# Altium PCB MSPpcb.PcbDoc
Units mil, origin at the board's own origin, x right, y up, seen from the top; angles counter-clockwise.
Board outline 6000 x 4000 mil, 2 copper layers (Top Layer, Bottom Layer); 37 components, 58 nets, 273 pads, 0 vias.
Unrouted connection lines stored in the file: 104.
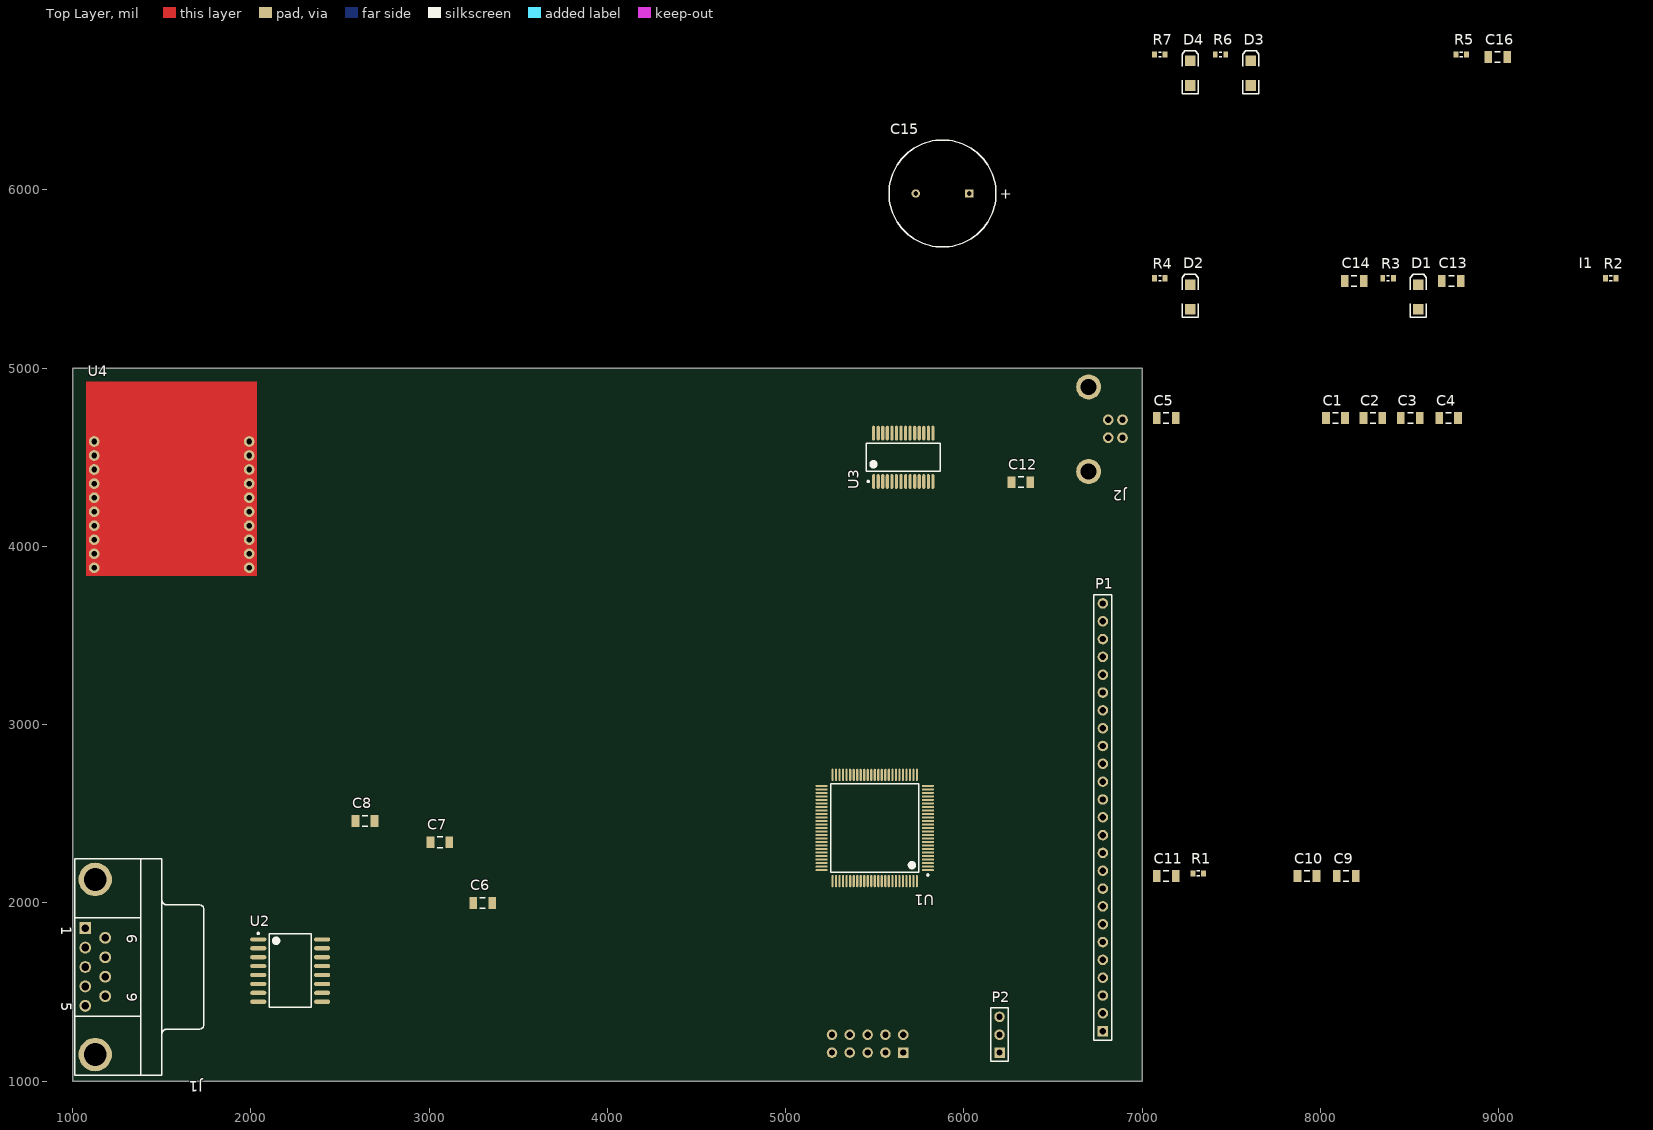
[diagram p0: Top Layer view]
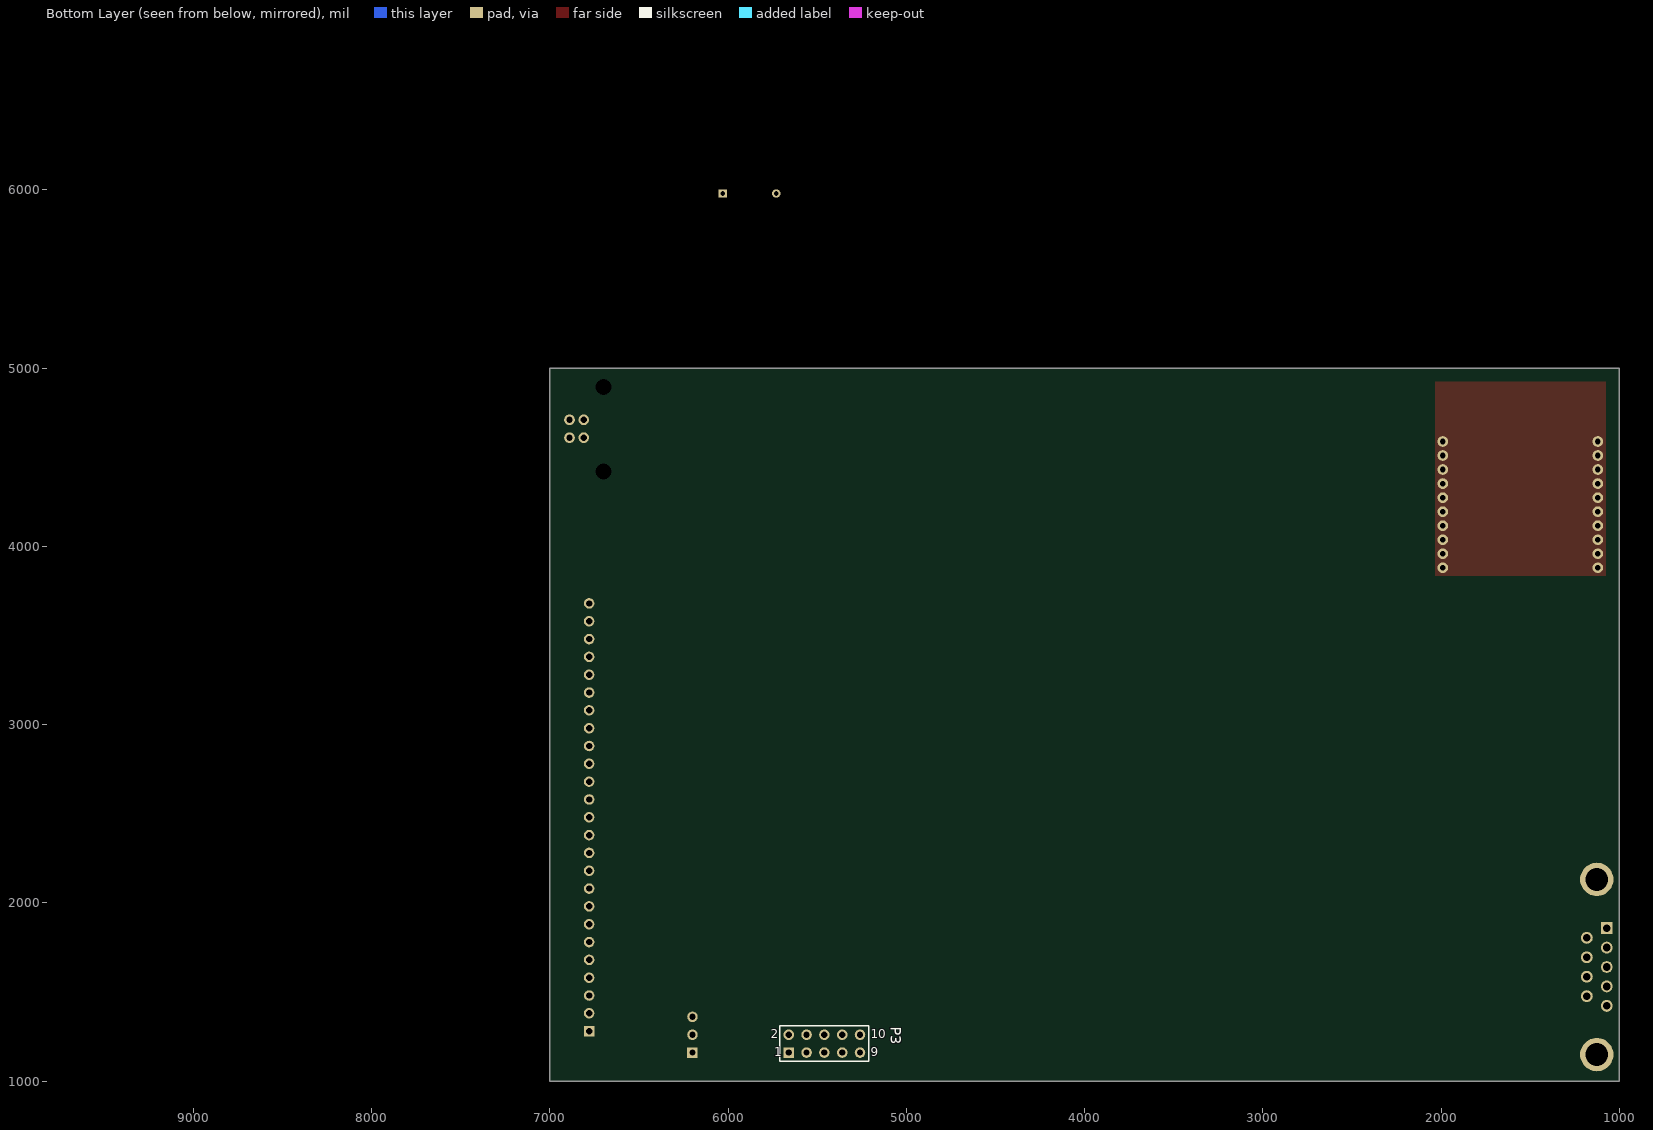
[diagram p1: Bottom Layer view, seen from below]

## Layer stack, top to bottom
Top Layer: signal copper 1.4
Dielectric: dielectric 12.6, FR-4, Dk 4.8
Bottom Layer: signal copper 1.4

## Board outline
1000,1000 7000,1000 7000,5000 1000,5000

## Design rules (kind name [scope] priority, off if disabled: settings)
Clearance [All] p1: gap=10
PolygonConnect [All] p1: connectstyle=Relief reliefconductorwidth=10 reliefentries=4 polygonreliefangle="90 Angle"
RoutingVias [All] p1: holewidth=28 width=50 viastyle="Through Hole" minholewidth=28 minwidth=50 maxholewidth=28 maxwidth=50
SilkscreenOverComponentPads [All] p1: minsilkscreentomaskgap=10
SolderMaskExpansion [All] p1: expansion=4
Width [All] p1: maxlimit=10 minlimit=10 preferedwidth=10
27 further rules are at their usual default settings.

## Classes and differential pairs
net class U4_Nets: GND NetR5_1 NetU4_4 NetU4_6 NetU4_7 NetU4_8 NetU4_9 NetU4_11 NetU4_12 NetU4_13 NetU4_14 NetU4_15 NetU4_16 NetU4_17 NetU4_18 NetU4_19 NetU4_20 VCC-3.3V XBEE_DIN XBEE_DOUT
net class U3_Nets: GND MSP_RTS MSP_RXD1 MSP_TXD1 NetC6_1 NetC13_2 NetJ2_2 NetJ2_3 NetU3_2 NetU3_6 NetU3_8 NetU3_9 NetU3_10 NetU3_11 NetU3_12 NetU3_13 NetU3_14 NetU3_19 NetU3_24 NetU3_27 NetU3_28 USB_RX USB_TX
net class U2_Nets: GND MSP_RXD3 MSP_TXD3 NetC6_1 NetC6_2 NetC7_1 NetC7_2 NetC8_1 NetC8_2 NetU2_6 NetU2_7 NetU2_8 NetU2_9 NetU2_10 RS232_RX RS232_TX
net class U1_Nets: GND H1_1 H1_2 H1_3 H1_4 H1_5 H1_6 H1_7 H1_8 H1_9 H1_10 H1_17 H1_18 H1_19 H1_20 H1_21 H1_22 H1_23 H1_24 H1_25 JTAG_RST JTAG_TCK JTAG_TDI JTAG_TDO JTAG_TEST JTAG_TMS MSP_RXD1 MSP_RXD3 MSP_TXD1 MSP_TXD3 NetC5_1 NetU1_13 NetU1_14 NetU1_26 NetU1_27 NetU1_28 NetU1_29 NetU1_30 NetU1_31 NetU1_32 NetU1_33 NetU1_34 NetU1_35 NetU1_36 NetU1_39 NetU1_40 NetU1_41 NetU1_42 NetU1_43 NetU1_44 NetU1_45 NetU1_46 NetU1_47 NetU1_48 NetU1_49 NetU1_50 NetU1_51 NetU1_52 NetU1_55 NetU1_56 NetU1_57 NetU1_58 NetU1_59 NetU1_60 NetU1_61 NetU1_65 NetU1_66 NetU1_67 NetU1_68 NetU1_69 NetU1_70 NetU1_71 NetU1_74 NetU1_75 NetU1_76 NetU1_77 NetU1_78 NetU1_79 NetU1_82 NetU1_83 NetU1_84 NetU1_85 NetU1_86 NetU1_89 NetU1_90 NetU1_97 NetU1_98 NetU1_99 NetU1_100 VCC-3.3V XBEE_DIN XBEE_DOUT
net class R7_Nets: NetD4_1 VCC
net class R6_Nets: NetD3_1 VCC
net class R5_Nets: NetR5_1 VCC-3.3V
net class R4_Nets: NetD2_1 VCC-3.3V
net class R3_Nets: NetD1_1 VCC-3.3V
net class R2_Nets: MSP_RTS VCC-3.3V
net class R1_Nets: JTAG_RST NetR1_2
net class P3_Nets: GND JTAG_RST JTAG_TCK JTAG_TDI JTAG_TDO JTAG_TEST JTAG_TMS NetP3_2 NetP3_4 NetP3_10
net class P2_Nets: VCC-3.3V VCCTARGET VCCTOOL
net class P1_Nets: H1_1 H1_2 H1_3 H1_4 H1_5 H1_6 H1_7 H1_8 H1_9 H1_10 H1_17 H1_18 H1_19 H1_20 H1_21 H1_22 H1_23 H1_24 H1_25 NetP1_11 NetP1_12 NetP1_13 NetP1_14 NetP1_15 NetP1_16
net class J2_Nets: NetC12_2 NetI1_1 NetJ2_2 NetJ2_3
net class J1_Nets: GND NetJ1_1 NetJ1_2 NetJ1_3 NetJ1_4 NetJ1_6 NetJ1_7 NetJ1_8 NetJ1_9
net class I1_Nets: NetC6_1 NetI1_1
net class D4_Nets: NetD4_1 XBEE_DIN
net class D3_Nets: NetD3_1 XBEE_DOUT
net class D2_Nets: NetD2_1 USB_TX
net class D1_Nets: NetD1_1 USB_RX
net class C16_Nets: GND VCC-3.3V
net class C15_Nets: GND VCC-3.3V
net class C14_Nets: GND VCC-3.3V
net class C13_Nets: GND NetC13_2
net class C12_Nets: GND NetC12_2
net class C11_Nets: GND JTAG_RST
net class C10_Nets: GND NetC10_2
net class C9_Nets: GND NetC6_1
net class C8_Nets: NetC8_1 NetC8_2
net class C7_Nets: NetC7_1 NetC7_2
net class C6_Nets: NetC6_1 NetC6_2
net class C5_Nets: GND NetC5_1
net class C4_Nets: GND VCC
net class C3_Nets: GND VCC
net class C2_Nets: GND VCC
net class C1_Nets: GND VCC
component class XBee: C16 D3 D4 R5 R6 R7 U4
component class "USB Interface": C12 C13 C14 C15 D1 D2 I1 J2 R2 R3 R4 U3
component class Sheet1: C1 C2 C3 C4 C5 P1 U1
component class Serial_and_JTAG: C6 C7 C8 C9 C10 C11 J1 P2 P3 R1 U2

## Components (designator, comment, footprint, x,y, rotation, side; value= is the part's Value field where it differs from the comment)
C1 "Cap Semi" CAPC3216L 8085,4720 r0 top
C2 "Cap Semi" CAPC3216L 8295,4720 r0 top
C3 "Cap Semi" CAPC3216L 8505,4720 r0 top
C4 "Cap Semi" CAPC3216L 8720,4720 r0 top
C5 "Cap Semi" CAPC3216L 7135,4720 r0 top
C6 "Cap Semi" CAPC3216L 3300,2000 r0 top
C7 "Cap Semi" CAPC3216L 3060,2340 r0 top
C8 "Cap Semi" CAPC3216L 2640,2460 r0 top
C9 "Cap Semi" CAPC3216L 8145,2150 r0 top
C10 "Cap Semi" CAPC3216L 7925,2150 r0 top
C11 "Cap Semi" CAPC3216L 7135,2150 r0 top
C12 "Cap Semi" CAPC3216L 6320,4360 r0 top
C13 "Cap Semi" CAPC3216L 8735,5490 r0 top
C14 "Cap Semi" CAPC3216L 8190,5490 r0 top
C15 "Cap Pol1" RB7.6-15 5880,5980 r0 top
C16 "Cap Semi" CAPC3216L 8995,6745 r0 top
D1 "LED2" DSO-F2/D6.1 8550,5400 r90 top
D2 "LED2" DSO-F2/D6.1 7270,5400 r90 top
D3 "LED2" DSO-F2/D6.1 7610,6655 r90 top
D4 "LED2" DSO-F2/D6.1 7270,6655 r90 top
I1 "ferrite bead" INDM2012X11N 9445,5525 r90 top
J1 "D Connector 9" DSUB1.385-2H9 1500,1640 r270 top
J2 "USBB" PCBComponent_1#1 6700,4420 r270 top
P1 "Header 25" HDR1X25 6780,1280 r90 top
P2 "Header 3" HDR1X3 6200,1160 r90 top
P3 "JTAG" HDR2X5 5660,1160 r180 bottom
R1 "Res3" RESC1608L 7315,2165 r0 top
R2 "Res3" RESC1608L 9630,5505 r0 top
R3 "Res3" RESC1608L 8380,5505 r0 top
R4 "Res3" RESC1608L 7100,5505 r0 top
R5 "Res3" RESC1608L 8790,6760 r0 top
R6 "Res3" RESC1608L 7440,6760 r0 top
R7 "Res3" RESC1608L 7100,6760 r0 top
U1 "MSP430" TSQFP50P1600X1600X160-100N 5500,2420 r180 top
U2 "MAX232CWE" WSO16_N 2220,1620 r0 top
U3 "FT232RL" SOP65P780X200-28N 5660,4500 r90 top
U4 "XBee" PCBComponent_1#2 1120,3880 r0 top

## Footprints (in the part's own frame and the unit in brackets; to place one, negate y for a bottom-side part, rotate by r counter-clockwise, add the part's x,y. Pads: shape width x height; smd on the part's side, far side on the other; paste and mask are expansions set on the pad)
CAPC3216L [mm] "Chip Capacitor, Body 3.2x1.6mm, IPC High Density"
  rect 1.1x1.7 smd: 1(-1.35,0) 2(1.35,0)
  silkscreen extent -0.4,-0.75 0.4,0.75, body extent -1.7,-0.9 1.7,0.9, height 1.3
DSO-F2/D6.1 [mm] "SMT LED; 2 Flat Leads"
  rect 1.5x1.5 smd: 1(-1.75,0) 2(1.75,0)
  silkscreen extent -2.9,-1.15 3.2,1.15
DSUB1.385-2H9 [mm] "Connector; D Subminiature; 9 Position; Right Angle; Pitch 1.385 mm"
  rect 1.69x1.69 hole 1.09: 1(-5.54,-10.92)
  round 1.69 hole 1.09: 2(-2.77,-10.92) 3(0,-10.92) 4(2.77,-10.92) 5(5.54,-10.92) 6(-4.155,-8.08) 7(-1.385,-8.08) 8(1.385,-8.08) 9(4.155,-8.08)
  round 4.76 hole 3.26: 10(-12.495,-9.5) 11(12.495,-9.5)
  silkscreen extent -15.4,-12.4 15.4,6
HDR1X3 [mm] "Connector; Header; 3 Position"
  rect 1.5x1.5 hole 0.9: 1(0,0)
  round 1.5 hole 0.9: 2(2.54,0) 3(5.08,0)
  silkscreen extent -1.27,-1.27 6.35,1.27
HDR1X25 [mm] "Connector; Header; 25 Position"
  rect 1.5x1.5 hole 0.9: 1(0,0)
  round 1.5 hole 0.9: 2(2.54,0) 3(5.08,0) 4(7.62,0) 5(10.16,0) 6(12.7,0) 7(15.24,0) 8(17.78,0) 9(20.32,0) 10(22.86,0) 11(25.4,0) 12(27.94,0) 13(30.48,0) 14(33.02,0) 15(35.56,0) 16(38.1,0) 17(40.64,0) 18(43.18,0) 19(45.72,0) 20(48.26,0) 21(50.8,0) 22(53.34,0) 23(55.88,0) 24(58.42,0) 25(60.96,0)
  silkscreen extent -1.27,-1.27 62.23,1.27
HDR2X5 [mm] "Connector; Header; 5x2 Position"
  rect 1.5x1.5 hole 0.9: 1(0,0)
  round 1.5 hole 0.9: 2(0,2.54) 3(2.54,0) 4(2.54,2.54) 5(5.08,0) 6(5.08,2.54) 7(7.62,0) 8(7.62,2.54) 9(10.16,0) 10(10.16,2.54)
  silkscreen extent -1.27,-1.27 11.43,3.81
INDM2012X11N [mil] "Molded Inductor, 2-Leads, Body 2.0x1.3mm, IPC Medium Density"
PCBComponent_1#1 [mil]
  round 60 / inner round 0 / far side round 60 hole 36.3: 2(-290,110) 3(-190,110) 4(-290,190) 5(-190,190)
  round 140 / inner round 0 / far side round 0 hole 90.6 paste+0: M1(-475,0)
  round 140 / inner round 0 / far side round 0 hole 90.6: M1(0,0)
PCBComponent_1#2 [mil]
  round 60 hole 31.5: 1(0,0) 2(0,78.74) 3(0,157.48) 4(0,236.22) 5(0,314.96) 6(0,393.7) 7(0,472.44) 8(0,551.18) 9(0,629.92) 10(0,708.66) 11(870,0) 12(870,78.74) 13(870,157.48) 14(870,236.22) 15(870,314.96) 16(870,393.7) 17(870,472.44) 18(870,551.18) 19(870,629.92) 20(870,708.66)
  Top Layer region: -45,-45 915,-45 915,1045 -45,1045
RB7.6-15 [mm] "Polarized Capacitor (Radial); 2 Leads"
  rect 1.2x1.2 hole 0.7: 1(3.81,0)
  round 1.2 hole 0.7: 2(-3.81,0)
  silkscreen extent -7.62,-7.62 7.62,7.62
RESC1608L [mm] "Chip Resistor, Body 1.6x0.8mm, IPC High Density"
  rect 0.7x0.9 smd: 1(-0.75,0) 2(0.75,0)
  silkscreen extent -0.2,-0.35 0.2,0.35, body extent -0.85,-0.48 0.85,0.48, height 0.9
SOP65P780X200-28N [mm] "SOP, 28-Leads, Body 10.5x5.6mm (max), Pitch 0.65mm, IPC Medium Density"
  oval 2.1x0.45 smd: 1(-3.45,4.225) 2(-3.45,3.575) 3(-3.45,2.925) 4(-3.45,2.275) 5(-3.45,1.625) 6(-3.45,0.975) 7(-3.45,0.325) 8(-3.45,-0.325) 9(-3.45,-0.975) 10(-3.45,-1.625) 11(-3.45,-2.275) 12(-3.45,-2.925) 13(-3.45,-3.575) 14(-3.45,-4.225) 15(3.45,-4.225) 16(3.45,-3.575) 17(3.45,-2.925) 18(3.45,-2.275) 19(3.45,-1.625) 20(3.45,-0.975) 21(3.45,-0.325) 22(3.45,0.325) 23(3.45,0.975) 24(3.45,1.625) 25(3.45,2.275) 26(3.45,2.925) 27(3.45,3.575) 28(3.45,4.225)
  silkscreen extent -3.57,-5.25 2,5.25, body extent -2.8,-5.25 2.8,5.25, height 2
TSQFP50P1600X1600X160-100N [mm] "TSQFP, 100-Leads, Body 16.2x16.2mm (max), Pitch 0.50mm, IPC Medium Density"
  oval 1.75x0.3 smd: 1(-7.575,6) 2(-7.575,5.5) 3(-7.575,5) 4(-7.575,4.5) 5(-7.575,4) 6(-7.575,3.5) 7(-7.575,3) 8(-7.575,2.5) 9(-7.575,2) 10(-7.575,1.5) 11(-7.575,1) 12(-7.575,0.5) 13(-7.575,0) 14(-7.575,-0.5) 15(-7.575,-1) 16(-7.575,-1.5) 17(-7.575,-2) 18(-7.575,-2.5) 19(-7.575,-3) 20(-7.575,-3.5) 21(-7.575,-4) 22(-7.575,-4.5) 23(-7.575,-5) 24(-7.575,-5.5) 25(-7.575,-6) 51(7.575,-6) 52(7.575,-5.5) 53(7.575,-5) 54(7.575,-4.5) 55(7.575,-4) 56(7.575,-3.5) 57(7.575,-3) 58(7.575,-2.5) 59(7.575,-2) 60(7.575,-1.5) 61(7.575,-1) 62(7.575,-0.5) 63(7.575,0) 64(7.575,0.5) 65(7.575,1) 66(7.575,1.5) 67(7.575,2) 68(7.575,2.5) 69(7.575,3) 70(7.575,3.5) 71(7.575,4) 72(7.575,4.5) 73(7.575,5) 74(7.575,5.5) 75(7.575,6)
  oval 0.3x1.75 smd: 26(-6,-7.575) 27(-5.5,-7.575) 28(-5,-7.575) 29(-4.5,-7.575) 30(-4,-7.575) 31(-3.5,-7.575) 32(-3,-7.575) 33(-2.5,-7.575) 34(-2,-7.575) 35(-1.5,-7.575) 36(-1,-7.575) 37(-0.5,-7.575) 38(0,-7.575) 39(0.5,-7.575) 40(1,-7.575) 41(1.5,-7.575) 42(2,-7.575) 43(2.5,-7.575) 44(3,-7.575) 45(3.5,-7.575) 46(4,-7.575) 47(4.5,-7.575) 48(5,-7.575) 49(5.5,-7.575) 50(6,-7.575) 76(6,7.575) 77(5.5,7.575) 78(5,7.575) 79(4.5,7.575) 80(4,7.575) 81(3.5,7.575) 82(3,7.575) 83(2.5,7.575) 84(2,7.575) 85(1.5,7.575) 86(1,7.575) 87(0.5,7.575) 88(0,7.575) 89(-0.5,7.575) 90(-1,7.575) 91(-1.5,7.575) 92(-2,7.575) 93(-2.5,7.575) 94(-3,7.575) 95(-3.5,7.575) 96(-4,7.575) 97(-4.5,7.575) 98(-5,7.575) 99(-5.5,7.575) 100(-6,7.575)
  silkscreen extent -7.7,-6.3 6.3,6.82, body extent -7,-7 7,7, height 1.6
WSO16_N [mm] "SOIC, 16-Leads, Body 10.3x7.5mm, Pitch 1.27mm, IPC Medium Density"
  oval 2.3x0.6 smd: 1(-4.55,4.445) 2(-4.55,3.175) 3(-4.55,1.905) 4(-4.55,0.635) 5(-4.55,-0.635) 6(-4.55,-1.905) 7(-4.55,-3.175) 8(-4.55,-4.445) 9(4.55,-4.445) 10(4.55,-3.175) 11(4.55,-1.905) 12(4.55,-0.635) 13(4.55,0.635) 14(4.55,1.905) 15(4.55,3.175) 16(4.55,4.445)
  silkscreen extent -4.67,-5.25 3,5.42, body extent -3.75,-5.25 3.75,5.25, height 2.65

## Part data
C1 C2 C3 C4 C5 C6 C7 C8 C9 C10 C11 C12 C13 C14 C16: "Capacitor (Semiconductor SIM Model)"
C15: "Polarized Capacitor (Radial)"
D1 D2 D3 D4: "Typical RED, GREEN, YELLOW, AMBER GaAs LED"
J1: "Receptacle Assembly, 9 Position, Right Angle"
P1: "Header, 25-Pin"
P2: "Header, 3-Pin"
P3: library part "Header 5X2", "Header, 5-Pin, Dual row"
R1 R2 R3 R4 R5 R6 R7: "Resistor"
U2: "+5V Powered RS-232 Driver/Receiver"

## Nets (pads, with @x,y where several pads share a name; then routed paths per layer and width w, separated by ;. In a path a pad name is that pad's centre, name@x,y a point inside that pad or via, vN(x,y) a via of type N, cw(c..) or ccw(c..) an arc to the next point about the centre after c; other vN are vias at no path point)
GND: C1.1 C2.1 C3.1 C4.1 C5.2 C9.1 C10.1 C11.1 C12.1 C13.1 C14.1 C15.2 C16.1 J1.5 J1.10 J1.11 P3.9 U1.12 U1.15 U1.37 U1.63 U1.88 U2.15 U3.7 U3.18 U3.21 U3.25 U3.26 U4.10
H1_1: P1.1 U1.1
H1_2: P1.2 U1.2
H1_3: P1.3 U1.3
H1_4: P1.4 U1.4
H1_5: P1.5 U1.5
H1_6: P1.6 U1.6
H1_7: P1.7 U1.7
H1_8: P1.8 U1.8
H1_9: P1.9 U1.9
H1_10: P1.10 U1.10
H1_17: P1.17 U1.17
H1_18: P1.18 U1.18
H1_19: P1.19 U1.19
H1_20: P1.20 U1.20
H1_21: P1.21 U1.21
H1_22: P1.22 U1.22
H1_23: P1.23 U1.23
H1_24: P1.24 U1.24
H1_25: P1.25 U1.25
JTAG_RST: C11.2 P3.8 R1.1 U1.96
JTAG_TCK: P3.7 U1.95
JTAG_TDI: P3.3 U1.93
JTAG_TDO: P3.1 U1.92
JTAG_TEST: P3.6 U1.91
JTAG_TMS: P3.5 U1.94
MSP_RTS: R2.1 U3.3
MSP_RXD1: U1.54 U3.1
MSP_RXD3: U1.81 U2.12
MSP_TXD1: U1.53 U3.5
MSP_TXD3: U1.80 U2.11
NetC5_1: C5.1 U1.62
NetC6_1: C6.1 C9.2 U2.16 U3.4 U3.20
NetC6_2: C6.2 U2.2
NetC7_1: C7.1 U2.1
NetC7_2: C7.2 U2.3
NetC8_1: C8.1 U2.5
NetC8_2: C8.2 U2.4
NetC12_2: C12.2 J2.4 J2.5
NetC13_2: C13.2 U3.17
NetD1_1: D1.1 R3.1
NetD2_1: D2.1 R4.1
NetD3_1: D3.1 R6.2
NetD4_1: D4.1 R7.2
NetI1_1: 
NetJ2_2: J2.2 U3.15
NetJ2_3: J2.3 U3.16
NetR5_1: R5.1 U4.5
RS232_RX: U2.13
RS232_TX: U2.14
USB_RX: D1.2 U3.22
USB_TX: D2.2 U3.23
VCC: C1.2 C2.2 C3.2 C4.2 R6.1 R7.1
VCC-3.3V: C14.2 C15.1 C16.2 P2.3 R2.2 R3.2 R4.2 R5.2 U1.11 U1.16 U1.38 U1.64 U1.87 U4.1
VCCTARGET: P2.1
VCCTOOL: P2.2
XBEE_DIN: D4.2 U1.72 U4.3
XBEE_DOUT: D3.2 U1.73 U4.2
pads on no net: C10.2 J1.1 J1.2 J1.3 J1.4 J1.6 J1.7 J1.8 J1.9 J2.M1 P1.11 P1.12 P1.13 P1.14 P1.15 P1.16 P3.2 P3.4 P3.10 R1.2 U1.13 U1.14 U1.26 U1.27 U1.28 U1.29 U1.30 U1.31 U1.32 U1.33 U1.34 U1.35 U1.36 U1.39 U1.40 U1.41 U1.42 U1.43 U1.44 U1.45 U1.46 U1.47 U1.48 U1.49 U1.50 U1.51 U1.52 U1.55 U1.56 U1.57 U1.58 U1.59 U1.60 U1.61 U1.65 U1.66 U1.67 U1.68 U1.69 U1.70 U1.71 U1.74 U1.75 U1.76 U1.77 U1.78 U1.79 U1.82 U1.83 U1.84 U1.85 U1.86 U1.89 U1.90 U1.97 U1.98 U1.99 U1.100 U2.6 U2.7 U2.8 U2.9 U2.10 U3.2 U3.6 U3.8 U3.9 U3.10 U3.11 U3.12 U3.13 U3.14 U3.19 U3.24 U3.27 U3.28 U4.4 U4.6 U4.7 U4.8 U4.9 U4.11 U4.12 U4.13 U4.14 U4.15 U4.16 U4.17 U4.18 U4.19 U4.20

## Text inside footprints (layer, text, board x,y; h text height)
C15: Top Overlay "+" at 6200.15,5950.99 h59.06
J1: Top Overlay "6" at 1304.13,1823.27 h59.06 r270; Top Overlay "9" at 1304.13,1496.1 h59.06 r270; Top Overlay "5" at 934.06,1441.57 h59.06 r270; Top Overlay "1" at 934.06,1867.95 h59.06 r270
P3: Bottom Overlay "10" at 5200,1240 h50; Bottom Overlay "9" at 5200,1140 h50; Bottom Overlay "1" at 5740,1140 h50; Bottom Overlay "2" at 5760,1240 h50